# EAGLE board DAC_OutputStage 3 (EAGLE 9.6.2)
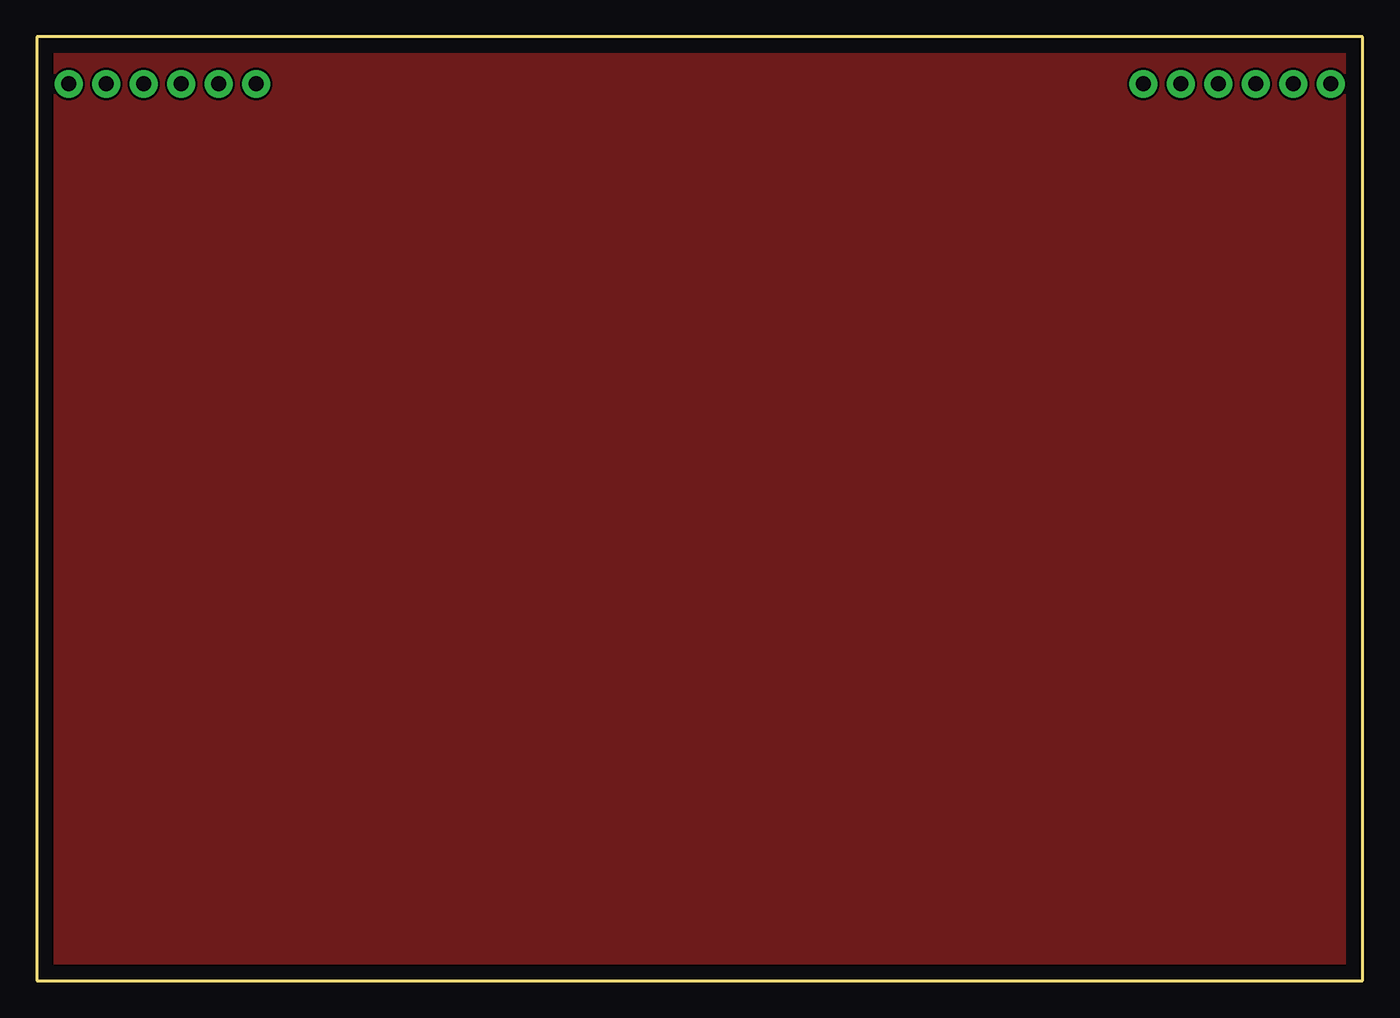
[diagram p0: board, top side]
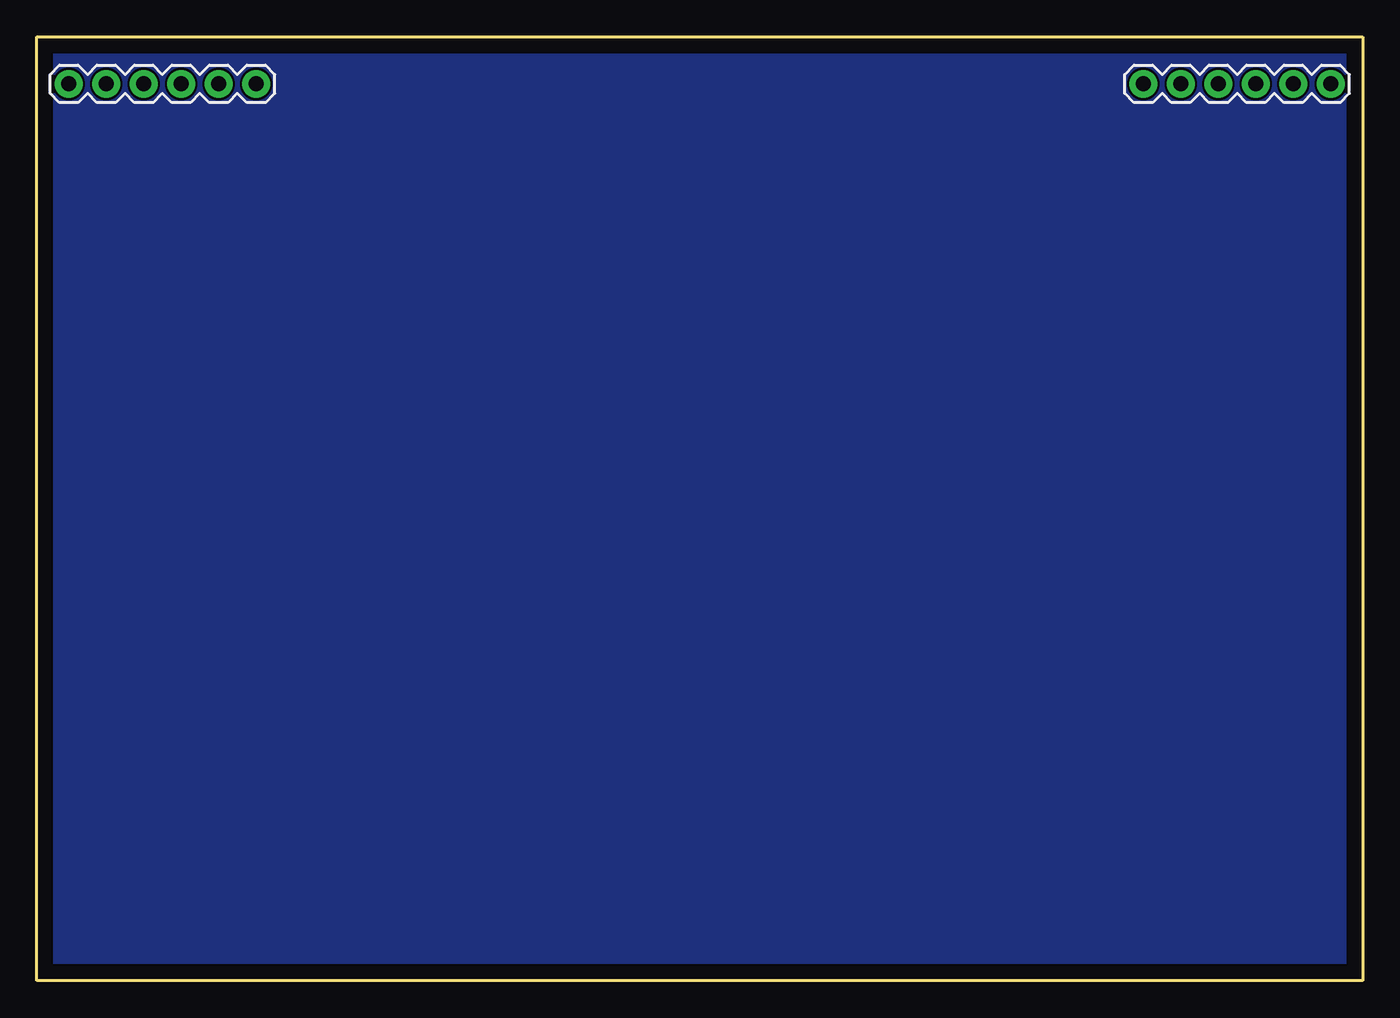
[diagram p1: board, bottom side, seen from below]

Size 89.89 x 64 mm. Coordinates in mm from the lower left corner, seen from the top.
Outline: 0,0 89.89,0 89.89,64 0,64 0,0
Copper layers (1*16): Top 0.035mm / dielectric 0.15mm / Bottom 0.035mm
Design rules "default": minimum track width 6mil, minimum drill 0.35mm, track to track 6mil, track to pad 6mil, pad to pad 6mil, via to via 6mil, smd to smd 6mil, copper to edge 40mil, drill to drill 6mil, minimum pad ring 10mil, minimum via ring 8mil, stop-mask expansion 4mil, vias tented up to drill 0mil, thermal gap 10mil
Net classes: 3 Power: width 1.27 mm, drill 1.27 mm, clearance 0.254 mm

## Footprints (pad centres in the part's own frame; a part is rotated, then mirrored left to right if it is on the bottom)
CAPPRD750W80D1475H4700 = drill 1 pad 1.5 square: 1 0,0 | drill 1 pad 1.5: 2 7.5,0
CAPPRD500W60D1025H1750 = drill 0.8 pad 1.2 square: 1 0,0 | drill 0.8 pad 1.2: 2 5,0
PANASONIC_A = smd 2 x 1.5: + 1.3,0; - -1.3,0
C0603 = smd 1.1 x 1: 1 -0.85,0; 2 0.85,0
CAPPRD150W45D450H600 = drill 0.65 pad 1.05 square: 1 0,0 | drill 0.65 pad 1.05: 2 1.5,0
MKP4D031003C00JSSD = drill 0.86 pad 1.397: 1 0,0; 2 10,0
C1206 = smd 1.6 x 1.8: 1 -1.4,0; 2 1.4,0
C7.5B3 = drill 0.914 pad 1.905 octagon: 1 -3.81,0; 2 3.81,0
MKP4D051007E00JSSD = drill 1.2 pad 1.8: 1 0,0; 2 37.5,0
CAPPRD750W80D1825H4150 = drill 1 pad 1.5 square: 1 0,0 | drill 1 pad 1.5: 2 7.5,0
DIOAD1405W86L465D235 = drill 1.05 pad 1.575 square: 1 0,0 | drill 1.05 pad 1.575: 2 14.1,0
1935190 = drill 1.3 pad 1.95 square: 1 0,0 | drill 1.3 pad 1.95: 2 5,0; 3 10,0; 4 15,0; 5 20,0
1X06 = drill 1.016 pad 1.88: 1 0,0; 2 2.54,0; 3 5.08,0; 4 7.62,0; 5 10.16,0; 6 12.7,0
1X07 = drill 1.016 pad 1.88: 1 0,0; 2 2.54,0; 3 5.08,0; 4 7.62,0; 5 10.16,0; 6 12.7,0; 7 15.24,0
R0603 = smd 1 x 1.1: 1 -0.85,0; 2 0.85,0
0411/15 = drill 0.914 octagon: 1 -7.62,0; 2 7.62,0
TRIMPOT_3266 = drill 1.016 pad 1.778: 1 -2.54,-1.27; 2 0,1.27; 3 2.54,-1.27
SJW = smd 1.27 x 2.54: 1 -1.27,0; 2 1.27,0
VT9-PT = drill 1.8 pad 2.4: 1 6.172,8.495; 2 0,10.5; 3 -6.172,8.495; 4 -9.986,3.245; 5 -9.986,-3.245; 6 -6.172,-8.495; 7 0,-10.5; 8 6.172,-8.495; 9 9.986,-3.244
B2,54 = smd 2.54 x 2.54: TP 0,0
CUI_SJ1-3523N = drill 0.8 long: 1 0,0; 2 5,-5; 3 5,5 | hole 1.2: -2.5,5; 0,5; 5,0; -2.5,-5; 0,-5

## Placement (x,y rotation side)
C1  68u  [CAPPRD750W80D1475H4700]  -51.9,40.51 0 top  (outside the outline)
C2  68u  [CAPPRD750W80D1475H4700]  -68.41,40.51 0 top  (outside the outline)
C3  68u  [CAPPRD750W80D1475H4700]  -84.92,40.51 0 top  (outside the outline)
C4  UCY2E220MPD1TD  [CAPPRD500W60D1025H1750]  -69.68,57.02 0 top  (outside the outline)
C5  68u  [CAPPRD750W80D1475H4700]  -101.43,40.51 0 top  (outside the outline)
C6  68u  [CAPPRD750W80D1475H4700]  -117.94,40.51 0 top  (outside the outline)
C7  68u  [CAPPRD750W80D1475H4700]  -30.31,59.56 0 top  (outside the outline)
C8  [PANASONIC_A]  -26.5,107.82 0 top  (outside the outline)
C9  [PANASONIC_A]  -31.58,107.82 0 top  (outside the outline)
C10  [PANASONIC_A]  -36.66,107.82 0 top  (outside the outline)
C11  [C0603]  -112.86,112.9 0 top  (outside the outline)
C12  [C0603]  -21.42,112.9 0 top  (outside the outline)
C13  [C0603]  -26.5,112.9 0 top  (outside the outline)
C14  [C0603]  -31.58,112.9 0 top  (outside the outline)
C15  [C0603]  -36.66,112.9 0 top  (outside the outline)
C15A  647-RNU1A100MDSASQ  [CAPPRD150W45D450H600]  -40.47,86.23 0 top  (outside the outline)
C15B  647-RNU1A100MDSASQ  [CAPPRD150W45D450H600]  -63.33,86.23 0 top  (outside the outline)
C16  [PANASONIC_A]  -41.74,107.82 0 top  (outside the outline)
C17  [PANASONIC_A]  -46.82,107.82 0 top  (outside the outline)
C17A  647-RNU1A100MDSASQ  [CAPPRD150W45D450H600]  -86.19,86.23 0 top  (outside the outline)
C17B  647-RNU1A100MDSASQ  [CAPPRD150W45D450H600]  -109.05,86.23 0 top  (outside the outline)
C18  [PANASONIC_A]  -51.9,107.82 0 top  (outside the outline)
C19  [C0603]  -41.74,112.9 0 top  (outside the outline)
C20  [C0603]  -46.82,112.9 0 top  (outside the outline)
C21  [C0603]  -51.9,112.9 0 top  (outside the outline)
C22  [C0603]  -56.98,112.9 0 top  (outside the outline)
C23  [C0603]  -62.06,112.9 0 top  (outside the outline)
C32  0.1uF, 35V  [C0603]  -92.54,92.58 0 top  (outside the outline)
C38*  0.1uF*, 63V  [MKP4D031003C00JSSD]  -35.39,92.58 0 top  (outside the outline)
C45*  4.7nF, 63V*  [C1206]  -114.13,79.88 0 top  (outside the outline)
C46*  0.033uF, 63V*  [C1206]  -63.33,79.88 0 top  (outside the outline)
C48  0.1uF, 35V  [C0603]  -102.7,92.58 0 top  (outside the outline)
C50  0.1uF, 35V  [C0603]  -112.86,92.58 0 top  (outside the outline)
C51*  0.01uF, 63V*  [C7.5B3]  -40.47,72.26 0 top  (outside the outline)
C52*  1500pF, 63V*  [C1206]  -90,79.88 0 top  (outside the outline)
C54*  4.7nF, 63V*  [C1206]  -26.5,86.23 0 top  (outside the outline)
C55*  0.033uF, 63V*  [C1206]  -77.3,79.88 0 top  (outside the outline)
C56*  1500pF, 63V*  [C1206]  -102.7,79.88 0 top  (outside the outline)
C57  0.1uF, 35V  [C0603]  -123.02,92.58 0 top  (outside the outline)
C58*  0.01uF, 63V*  [C7.5B3]  -53.17,72.26 0 top  (outside the outline)
C59*  0.1uF*, 63V  [MKP4D031003C00JSSD]  -50.63,92.58 0 top  (outside the outline)
C64  0.1uF, 35V  [C0603]  -26.5,97.66 0 top  (outside the outline)
C65  0.1uF, 35V  [C0603]  -36.66,97.66 0 top  (outside the outline)
C67  0.1uF, 35V  [C0603]  -46.82,97.66 0 top  (outside the outline)
C68*  10uF*  [MKP4D051007E00JSSD]  -58.25,22.73 0 top  (outside the outline)
C69  0.1uF, 35V  [C0603]  -56.98,97.66 0 top  (outside the outline)
C70*  10uF*  [MKP4D051007E00JSSD]  -102.7,22.73 0 top  (outside the outline)
C92*  0.1uF*, 63V  [MKP4D031003C00JSSD]  -65.87,92.58 0 top  (outside the outline)
C93*  0.1uF*, 63V  [MKP4D031003C00JSSD]  -81.11,92.58 0 top  (outside the outline)
C94*  UKZ1H102MHM  [CAPPRD750W80D1825H4150]  -79.84,-1.4 0 top  (outside the outline)
C95*  UKZ1H102MHM  [CAPPRD750W80D1825H4150]  -101.43,-1.4 0 top  (outside the outline)
D1  1N4007FFG  [DIOAD1405W86L465D235]  -45.55,117.98 0 top  (outside the outline)
D2  1N4007FFG  [DIOAD1405W86L465D235]  -67.14,117.98 0 top  (outside the outline)
D3  1N4007FFG  [DIOAD1405W86L465D235]  -88.73,117.98 0 top  (outside the outline)
D4  1N4007FFG  [DIOAD1405W86L465D235]  -110.32,117.98 0 top  (outside the outline)
J1  1935190  [1935190]  -102.7,57.02 0 top  (outside the outline)
J4  [1X06]  -106.51,107.82 0 top  (outside the outline)
J6  [1X07]  -70.95,107.82 0 top  (outside the outline)
J7  [1X06]  75.03,60.81 180 bottom
J8  [1X06]  2.16,60.81 180 bottom
J10  [1X07]  -90,107.82 0 top  (outside the outline)
J13  [1X06]  -123.02,107.82 0 top  (outside the outline)
R1  [R0603]  -121.75,112.9 0 top  (outside the outline)
R2  220  [0411/15]  -67.14,69.72 0 top  (outside the outline)
R3  220  [0411/15]  -84.92,69.72 0 top  (outside the outline)
R4  100k  [0411/15]  -102.7,69.72 0 top  (outside the outline)
R5  100k  [0411/15]  -26.5,78.61 0 top  (outside the outline)
R6  330  [0411/15]  -44.28,78.61 0 top  (outside the outline)
R7  [R0603]  -20.15,116.71 0 top  (outside the outline)
R8  [R0603]  -23.96,116.71 0 top  (outside the outline)
R9  [R0603]  -27.77,116.71 0 top  (outside the outline)
R10  [R0603]  -67.14,112.9 0 top  (outside the outline)
R11  [R0603]  -117.94,112.9 0 top  (outside the outline)
R12  [R0603]  -72.22,112.9 0 top  (outside the outline)
R13  [R0603]  -77.3,112.9 0 top  (outside the outline)
R13*  1k*  [R0603]  -63.33,97.66 0 top  (outside the outline)
R14  [R0603]  -82.38,112.9 0 top  (outside the outline)
R14*  1k*  [R0603]  -69.68,97.66 0 top  (outside the outline)
R15  [R0603]  -87.46,112.9 0 top  (outside the outline)
R16  [R0603]  -92.54,112.9 0 top  (outside the outline)
R17  [R0603]  -97.62,112.9 0 top  (outside the outline)
R18  1M*  [R0603]  -110.32,102.74 0 top  (outside the outline)
R19  1M* (Var)  [TRIMPOT_3266]  -43.01,54.48 0 top  (outside the outline)
R20  1M* (Var)  [TRIMPOT_3266]  -55.71,54.48 0 top  (outside the outline)
R21  100*  [R0603]  -59.52,102.74 0 top  (outside the outline)
R22  1M*  [R0603]  -115.4,102.74 0 top  (outside the outline)
R23  100*  [R0603]  -64.6,102.74 0 top  (outside the outline)
R24  100*  [R0603]  -69.68,102.74 0 top  (outside the outline)
R25  100*  [R0603]  -74.76,102.74 0 top  (outside the outline)
R26  [R0603]  -102.7,112.9 0 top  (outside the outline)
R27  [R0603]  -107.78,112.9 0 top  (outside the outline)
R32*  1*  [R0603]  -76.03,97.66 0 top  (outside the outline)
R33*  1*  [R0603]  -82.38,97.66 0 top  (outside the outline)
R34*  300*  [R0603]  -88.73,97.66 0 top  (outside the outline)
R35*  300*  [R0603]  -95.08,97.66 0 top  (outside the outline)
R36*  91*  [R0603]  -101.43,97.66 0 top  (outside the outline)
R37*  910*  [R0603]  -107.78,97.66 0 top  (outside the outline)
R38*  300*  [R0603]  -114.13,97.66 0 top  (outside the outline)
R39  1M*  [R0603]  -120.48,102.74 0 top  (outside the outline)
R40  1M*  [R0603]  -21.42,107.82 0 top  (outside the outline)
R42  100*  [R0603]  -79.84,102.74 0 top  (outside the outline)
R43  100*  [R0603]  -84.92,102.74 0 top  (outside the outline)
R44  150*  [R0603]  -90,102.74 0 top  (outside the outline)
R45  150*  [R0603]  -95.08,102.74 0 top  (outside the outline)
R46*  910*  [R0603]  -120.48,97.66 0 top  (outside the outline)
R47*  27*  [R0603]  -22.69,102.74 0 top  (outside the outline)
R48  100*  [R0603]  -100.16,102.74 0 top  (outside the outline)
R49  100*  [R0603]  -105.24,102.74 0 top  (outside the outline)
R50*  91*  [R0603]  -29.04,102.74 0 top  (outside the outline)
R51*  910*  [R0603]  -35.39,102.74 0 top  (outside the outline)
R52*  910*  [R0603]  -41.74,102.74 0 top  (outside the outline)
R53*  300*  [R0603]  -48.09,102.74 0 top  (outside the outline)
R54*  27*  [R0603]  -54.44,102.74 0 top  (outside the outline)
SJ1  SJW  [SJW]  -123.02,84.96 0 top  (outside the outline)
SJ2  SJW  [SJW]  -20.15,91.31 0 top  (outside the outline)
SX1  VT9-PT  [VT9-PT]  -30.31,1.14 0 top  (outside the outline)
SX2  VT9-PT  [VT9-PT]  -54.44,1.14 0 top  (outside the outline)
TP1  2.54MM_TESTPOINTB2,54  [B2,54]  -119.21,55.75 0 top  (outside the outline)
TP2  2.54MM_TESTPOINTB2,54  [B2,54]  -31.58,72.26 0 top  (outside the outline)
U$2  SJ1-3523N  [CUI_SJ1-3523N]  -26.5,41.78 0 top  (outside the outline)

## Library data of the parts
C1-C3 C5-C7 = 500HXW68MEFR14.5X45; DESCRIPTION: Aluminum Electrolytic Capacitors - Radial Leaded GENERAL PURPOSE ELECTROLYTIC CAPACITORS; HEIGHT: 47mm; MANUFACTURER_NAME: Rubycon; MANUFACTURER_PART_NUMBER: 500HXW68MEFR14.5X45
C4 = UCY2E220MPD1TD; DESCRIPTION: Aluminum Electrolytic Capacitors - Radial Leaded 22uF 250V 20% AEC-Q200; HEIGHT: 17.5mm; MANUFACTURER_NAME: Nichicon; MANUFACTURER_PART_NUMBER: UCY2E220MPD1TD; MOUSER_PART_NUMBER: 647-UCY2E220MPD1TD; MOUSER_PRICE-STOCK: https://www.mouser.co.uk/ProductDetail/Nichicon/UCY2E220MPD1TD?qs=JgOBn5pVFooNXIGMeLbPFg%3D%3D
C8-C23 = rcl; SPICEPREFIX: C
C15A C15B C17A C17B = Dual Mono Amp Library; DESCRIPTION: Aluminum Organic Polymer Capacitors 10 Volt 10uF 20%; HEIGHT: 6mm; MANUFACTURER_NAME: Nichicon; MANUFACTURER_PART_NUMBER: RNU1A100MDSASQ; MOUSER_PART_NUMBER: 647-RNU1A100MDSASQ; MOUSER_PRICE-STOCK: https://www.mouser.co.uk/ProductDetail/Nichicon/RNU1A100MDSASQ?qs=eL6fcoQH66Plszdei%2FxZtw%3D%3D
C32 C48 C50 C57 C64 C65 C67 C69 = Hifi Nutube DAC (Next 6) 28; BOM: Yes; DESCRIPTION: Multilayer Ceramic Capacitors MLCC - SMD/SMT 0603 35VDC 0.1uF 20% X7R AEC-Q200; DISTRIBUTOR_PART_NUMBER: 963-GMJ107BB7104MAHT; HEIGHT: 1mm; LINK: https://www.mouser.com/ProductDetail/Taiyo-Yuden/GMJ107BB7104MAHT?qs=%2Fha2pyFadujHrlowQtTjdnqfzoSa0Cvv97OkvRNS3sSjPFq524h2H2kGErSK5VOC; MANUFACTURER_NAME: Taiyo Yuden; MANUFACTURER_PART_NUMBER: GMJ107BB7104MAHT
C38* C59* C92* C93* = Hifi Nutube DAC (Next 6) 28; BOM: Yes; DESCRIPTION: Film Capacitors; DISTRIBUTOR_PART_NUMBER: 505-MKP4D031003C00JS; HEIGHT: 9mm; LINK: https://www.mouser.co.uk/ProductDetail/WIMA/MKP4D031003C00JSSD?qs=sJjjjplDs9ueBXe0w9lo%252BA%3D%3D; MANUFACTURER_NAME: WIMA; MANUFACTURER_PART_NUMBER: MKP4D031003C00JSSD
C45* C54* = Hifi Nutube DAC (Next 6) 28; BOM: Yes; DESCRIPTION: Film Capacitors 0.0047uF 100V; DISTRIBUTOR_PART_NUMBER: 598-FCN1206A472J-H3; HEIGHT: 1.5mm; LINK: https://www.mouser.com/ProductDetail/Cornell-Dubilier-CDE/FCN1206A472J-H3?qs=%2Fha2pyFaduhORVfYbZCGmxCqK95db7zSSJWHojgdBI%252BzmFkScQF0nfenN9ZoeiEO; MANUFACTURER_NAME: Cornell Dubilier; MANUFACTURER_PART_NUMBER: FCN1206A472J-H3
C46* C55* = Hifi Nutube DAC (Next 6) 28; BOM: Yes; DESCRIPTION: Film Capacitors 50V 0.033uF 10% AEC-Q200; DISTRIBUTOR_PART_NUMBER: 80-LDECA2330KA0N00; HEIGHT: 1.2mm; LINK: https://www.mouser.com/ProductDetail/KEMET/LDECA2330KA0N00?qs=%2Fha2pyFadugEIyDQa2ENH0AjZxxQDZeJ28kAZuvR%2FC2losCklUdb6g1kt1ueSJBC; MANUFACTURER_NAME: KEMET; MANUFACTURER_PART_NUMBER: LDECA2330KA0N00
C51* C58* = Hifi Nutube DAC (Next 6) 28; BOM: Yes
C52* C56* = Hifi Nutube DAC (Next 6) 28; BOM: Yes; DESCRIPTION: Film Capacitors 0.0015uF 100V; DISTRIBUTOR_PART_NUMBER: 598-FCN1206A152J-H2; HEIGHT: 1.1mm; LINK: https://www.mouser.com/ProductDetail/Cornell-Dubilier-CDE/FCN1206A152J-H2?qs=%2Fha2pyFaduhORVfYbZCGm9sZSPI%2Fe%2FXuzEUMvkXHyu6tGyMfSwqf2I4Pf5lTfeGU; MANUFACTURER_NAME: Cornell Dubilier; MANUFACTURER_PART_NUMBER: FCN1206A152J-H2
C68* C70* = Hifi Nutube DAC (Next 6) 28; BOM: Yes; DESCRIPTION: Film Capacitors 10uF 100 Volts 5%; DISTRIBUTOR_PART_NUMBER: 505-MKP4D051007E00JS; HEIGHT: 29mm; LINK: https://www.mouser.co.uk/ProductDetail/WIMA/MKP4D051007E00JSSD?qs=K1lkoHpmGTrGA8Eiln8cbQ%3D%3D; MANUFACTURER_NAME: WIMA; MANUFACTURER_PART_NUMBER: MKP4D051007E00JSSD
C94* C95* = Hifi Nutube DAC (Next 6) 28; BOM: Yes; DESCRIPTION: Aluminum Electrolytic Capacitors - Radial Leaded 50volts 1000uF 105c 18x40 7.5LS; DISTRIBUTOR_PART_NUMBER: 647-UKZ1H102MHM; HEIGHT: 41.5mm; LINK: https://www.mouser.co.uk/ProductDetail/Nichicon/UKZ1H102MHM?qs=kArNe9LFxXlhtsXCcA9QZA%3D%3D; MANUFACTURER_NAME: Nichicon; MANUFACTURER_PART_NUMBER: UKZ1H102MHM
D1-D4 = 1N4007FFG; DESCRIPTION: Rectifiers 1000V 1A Standard; HEIGHT: mm; MANUFACTURER_NAME: onsemi; MANUFACTURER_PART_NUMBER: 1N4007FFG; MOUSER_PART_NUMBER: 863-1N4007FFG; MOUSER_PRICE-STOCK: https://www.mouser.co.uk/ProductDetail/onsemi/1N4007FFG?qs=y2kkmE52mdPFE87Rxbyfgw%3D%3D
J1 = 1935190; DESCRIPTION: PCB terminal block, nominal current: 17.5 A, rated voltage (III/2): 400 V, nominal cross section: 1.5 mm?, Number of potentials: 5, Number of rows: 1, Number of positions per row: 5, product range: PT 1,5/..-H, pitch: 5 mm, connection method: Screw connection with wire protector, mounting: Wave soldering, conductor/PCB connection direction: 0 ?, color: green, Pin layout: Linear pinning, Solder pin [P]: 3.5 mm, type of packaging: packed in cardboard; HEIGHT: 11.55mm; MANUFACTURER_NAME: Phoenix Contact; MANUFACTURER_PART_NUMBER: 1935190; MOUSER_PART_NUMBER: 651-1935190; MOUSER_PRICE-STOCK: https://www.mouser.co.uk/ProductDetail/Phoenix-Contact/1935190?qs=QWULklcAmSS%2FS46GSzyZOw%3D%3D
J4 J7 J8 J13 = Dual Mono Amp Library; PROD_ID: CONN-08437
J6 J10 = Dual Mono Amp Library; PROD_ID: Combine 8288+14485
R1-R17 R26 R27 = rcl; SPICEPREFIX: R
R13* R14* = Hifi Nutube DAC (Next 6) 28; BOM: Yes; DESCRIPTION: Thick Film Resistors - SMD 0603 1Kohm 1% Anti-Surge AEC-Q200; DISTRIBUTOR_PART_NUMBER: 667-ERJ-PA3F1001V; HEIGHT: 0.45mm; LINK: https://www.mouser.com/ProductDetail/Panasonic/ERJ-PA3F1001V?qs=%2Fha2pyFadujWqMGonbcVXWpx%2FU6%252B66FAhXV1JmAEZGPjthXsc9llFQZIBNUyHLnF; MANUFACTURER_NAME: Panasonic; MANUFACTURER_PART_NUMBER: ERJ-PA3F1001V
R18 R22 R39 R40 = Hifi Nutube DAC (Next 6) 28; BOM: Yes; DESCRIPTION: Thick Film Resistors - SMD 1M OHM 1% 1/4W TC100; DISTRIBUTOR_PART_NUMBER: 652-CMP0603AFX-1004L; HEIGHT: 0.45mm; LINK: https://www.mouser.com/ProductDetail/Bourns/CMP0603AFX-1004ELF?qs=%2Fha2pyFaduhorRtoKKmEbo5q%2F6upGdOUUG%2FOf1KJV0z32o3g29o%2FeIMT1W%2FSHjF0; MANUFACTURER_NAME: Bourns; MANUFACTURER_PART_NUMBER: CMP0603AFX-1004ELF
R19 R20 = Hifi Nutube DAC (Next 6) 28; BOM: Yes; DESCRIPTION: TRIM POT, 1/4 BOURNS 3266
R21 R23-R25 R42 R43 R48 R49 = Hifi Nutube DAC (Next 6) 28; BOM: Yes; DESCRIPTION: Thick Film Resistors - SMD 0603 100ohm 1% Anti Surge AEC-Q200; DISTRIBUTOR_PART_NUMBER: 755-ESR03EZPF1000; HEIGHT: 0.45mm; LINK: https://www.mouser.com/ProductDetail/ROHM-Semiconductor/ESR03EZPF1000?qs=493kPxzlxfJdLkJZpX4ByA%3D%3D; MANUFACTURER_NAME: ROHM Semiconductor; MANUFACTURER_PART_NUMBER: ESR03EZPF1000
R32* R33* = Hifi Nutube DAC (Next 6) 28; BOM: Yes; DESCRIPTION: Thick Film Resistors - SMD 0603 1ohm 1% Anti Surge AEC-Q200; DISTRIBUTOR_PART_NUMBER: 755-ESR03EZPF1R00; HEIGHT: 0.45mm; LINK: https://www.mouser.com/ProductDetail/ROHM-Semiconductor/ESR03EZPF1R00?qs=%2Fha2pyFaduh9eay%252BsNz7PGNzrDcrKL3hZWraHvdrMk1JVIx2uIeBCVsTnUf%2FHw0o; MANUFACTURER_NAME: ROHM Semiconductor; MANUFACTURER_PART_NUMBER: ESR03EZPF1R00
R34* R35* R38* R53* = Hifi Nutube DAC (Next 6) 28; BOM: Yes; DESCRIPTION: Thick Film Resistors - SMD 0603 300ohm 1% Anti Surge AEC-Q200; DISTRIBUTOR_PART_NUMBER: 755-ESR03EZPF3000; HEIGHT: 0.45mm; LINK: https://www.mouser.com/ProductDetail/ROHM-Semiconductor/ESR03EZPF3000?qs=%2Fha2pyFaduh9eay%252BsNz7PFRefpzKMD9xofWTCPSmhdFs%252BZbv2oFxKRLRaxU5PZdR; MANUFACTURER_NAME: ROHM Semiconductor; MANUFACTURER_PART_NUMBER: ESR03EZPF3000
R36* R50* = Hifi Nutube DAC (Next 6) 28; BOM: Yes; DESCRIPTION: Thick Film Resistors - SMD 0603 91ohm 1% Anti-Surge AEC-Q200; DISTRIBUTOR_PART_NUMBER: 667-ERJ-PA3F91R0V; HEIGHT: 0.45mm; LINK: https://www.mouser.com/ProductDetail/Panasonic/ERJ-PA3F1001V?qs=%2Fha2pyFadujWqMGonbcVXWpx%2FU6%252B66FAhXV1JmAEZGPjthXsc9llFQZIBNUyHLnF; MANUFACTURER_NAME: Panasonic; MANUFACTURER_PART_NUMBER: ERJ-PA3F91R0V
R37* R46* R51* R52* = Hifi Nutube DAC (Next 6) 28; BOM: Yes; DESCRIPTION: Thick Film Resistors - SMD 0603 910ohm 1% Anti Surge AEC-Q200; DISTRIBUTOR_PART_NUMBER: 755-ESR03EZPF9100; HEIGHT: 0.45mm; LINK: https://www.mouser.com/ProductDetail/ROHM-Semiconductor/ESR03EZPF9100?qs=%2Fha2pyFaduh9eay%252BsNz7PCwRLTV5C4umDAX1y3ISJId208aI4l%252BoDAAx8YjFKWfQ; MANUFACTURER_NAME: ROHM Semiconductor; MANUFACTURER_PART_NUMBER: ESR03EZPF9100
R44 R45 = Hifi Nutube DAC (Next 6) 28; BOM: Yes; DESCRIPTION: Thick Film Resistors - SMD 0603 150ohm 1% Anti Surge AEC-Q200; DISTRIBUTOR_PART_NUMBER: 755-ESR03EZPF1500; HEIGHT: 0.45mm; LINK: https://www.mouser.com/ProductDetail/ROHM-Semiconductor/ESR03EZPF1500?qs=493kPxzlxfJnXyruM80Mgw%3D%3D; MANUFACTURER_NAME: ROHM Semiconductor; MANUFACTURER_PART_NUMBER: ESR03EZPF1500
R47* R54* = Hifi Nutube DAC (Next 6) 28; BOM: Yes; DESCRIPTION: Thick Film Resistors - SMD 27 OHM 1% 1/4W TC100; DISTRIBUTOR_PART_NUMBER: 652-CMP0603AFX-27R0L; HEIGHT: 0.45mm; LINK: https://www.mouser.com/ProductDetail/Bourns/CMP0603AFX-27R0ELF?qs=%2Fha2pyFaduhorRtoKKmEbtYBlIaVjUkc4K3wtBqYll71wqKXRZ5A38EveW8IeqhA; MANUFACTURER_NAME: Bourns; MANUFACTURER_PART_NUMBER: CMP0603AFX-27R0ELF
SJ1 SJ2 TP1 TP2 = Hifi Nutube DAC (Next 6) 28; BOM: No
SX1 SX2 = belton-engineering
U$2 = Hifi Nutube DAC (Next 6) 28; BOM: Yes; DESCRIPTION: 3.5 mm Right-Angle Stereo Jack, 3 Pin PCB Mount, Non-Threaded; MANUFACTURER_NAME: CUI

## Nets
66.3VAC/1: SX1.4 SX2.4
66.3VAC/2: SX1.5 SX2.5
126.3VAC/1: J1.1
126.3VAC/2: J1.2
+3.3V_ANALOG [Power]: R44.2 R45.1
+5V/1: C15A.1 C17A.1 J6.4 J6.5
+5V/2: C15B.1 J10.4
+18V [Power]: C48.1 C64.1 C65.1 C69.1
+240VDC: C10.+ C18.+ J1.5 SX1.6 SX2.6
-18V [Power]: C32.1 C50.1 C57.1 C67.1 R43.1 R49.1
AGND [Power]: C8.- C10.- C12.2 C16.- C18.- C20.2 C32.2 C45*.2 C46*.2 C48.2 C50.2 C51*.2 C54*.2 C55*.2 C57.2 C58*.2 C64.2 C65.2 C67.2 C68*.2 C69.2 C70*.2 R9.1 R11.2 R13*.1 R14*.1 R16.1 R18.2 R22.1 R26.2 R34*.1 R38*.1 R39.1 R40.1 U$2.1
AOUTL_N [R_Audio]: R52*.2
AOUTL_P [R_Audio]: R53*.1
AOUTR_N [R_Audio]: R46*.2
AOUTR_P [R_Audio]: R35*.1
DGND: C1.2 C2.2 C3.2 C4.2 C5.2 C6.2 C7.2 C15A.2 C15B.2 C17A.2 C17B.2 D1.2 D2.2 J1.4 J4.2 J4.5 J6.2 J6.7 J10.7 J13.5 R5.1
L+: C11.1
L-: C14.1
L_OUT: C13.1 C15.1 R9.2 R10.1 U$2.2
N$1: R3.1
N$2: D1.1 D4.2
N$3: C1.1 D3.1 D4.1
N$4: D2.1 D3.2
N$5: C2.1 R6.2
N$6: C4.1 R2.1 R3.2 R4.1 R5.2
N$8: C11.2 R1.1
N$9: C12.1 R1.2 R8.2 SX2.7
N$10: C93*.1
N$11: C92*.1
N$13: C19.2 R13.1
N$14: C9.+ R7.2 SX2.8
N$15: C9.- C13.2 R7.1 R8.1 SX2.1
N$16: C20.1 R13.2 R15.2 SX1.7
N$17: C17.+ R14.2 SX1.8
N$18: C17.- C21.2 R14.1 R15.1 SX1.1
N$19: C14.2 R12.1
N$20: C15.2 R10.2 R12.2 SX2.2
N$21: C8.+ R11.1 SX2.3
N$22: C22.2 R27.1
N$23: C23.2 R17.2 R27.2 SX1.2
N$24: C68*.1 R44.1
N$25: C70*.1 R45.2
N$26: C16.+ R26.1 SX1.3
N$29: C45*.1 R54*.1
N$30: C46*.1 R34*.2 R35*.2 R54*.2
N$31: C52*.1 R37*.1 R40.2
N$32: C52*.2 R36*.1
N$33: C51*.1 R36*.2 R37*.2 R46*.1
N$34: C54*.1 R47*.1
N$35: R21.2
N$36: C55*.1 R38*.2 R47*.2 R53*.2
N$37: C56*.1 R39.2 R51*.1
N$38: C56*.2 R50*.1
N$39: R19.3 R21.1 SJ1.1
N$40: R23.2
N$41 [R_Audio]: J4.4 J6.6
N$42: J10.2 J13.2
N$43: R24.2
N$44: R20.3 R24.1 SJ2.1
N$45: R25.2
N$46: C17B.1 J10.5
N$48: C58*.1 R50*.2 R51*.2 R52*.1
N$49: C59*.2 C94*.2 R14*.2
N$50: R32*.1
N$51: C59*.1 C94*.1 R32*.2
N$52: C38*.1 C95*.1 R33*.2
N$53: C38*.2 C95*.2 R13*.2
N$54: R19.1 R19.2 R23.1 TP1.TP
N$55: R20.1 R20.2 R25.1 TP2.TP
N$56: R48.2
N$57: R48.1
N$58: R49.2
N$60: R42.2
N$61: R42.1
N$63: R33*.1
N$65: R43.2
N$79: J10.1 J13.1
N$80: J13.6
N$82 [L_Audio]: J4.1 J6.1
N$83 [L_Audio]: J4.3 J6.3
N$87: J10.3 J13.3
N$88: J10.6 J13.4
N$90: J4.6
NUTUBE_L: C93*.2 R18.1
NUTUBE_R: C92*.2 R22.2
PE: J1.3
R+: C19.1
R-: C22.1
R_OUT: C21.1 C23.1 R16.2 R17.1 U$2.3
VCC: C3.1 C5.1 C6.1 C7.1 R4.2 R6.1 SJ1.2 SJ2.2

## Tracks (layer width: path | path; a pad name or v marks a point on that pad's centre or on a via)
66.3VAC/1  (1 unrouted)
66.3VAC/2  (1 unrouted)
+3.3V_ANALOG  (1 unrouted)
+5V/1  (3 unrouted)
+5V/2  (1 unrouted)
+18V  (3 unrouted)
+240VDC  (4 unrouted)
-18V  (5 unrouted)
AGND  (34 unrouted)
DGND  (20 unrouted)
DGND1
  pour Bottom (rank 6): 0,64 0,0 89.89,0 89.89,64
  pour Top (rank 6, no thermals): 0,64 0,0 89.89,0 89.89,64
L_OUT  (4 unrouted)
N$2  (1 unrouted)
N$3  (2 unrouted)
N$4  (1 unrouted)
N$5  (1 unrouted)
N$6  (4 unrouted)
N$8  (1 unrouted)
N$9  (3 unrouted)
N$13  (1 unrouted)
N$14  (2 unrouted)
N$15  (4 unrouted)
N$16  (3 unrouted)
N$17  (2 unrouted)
N$18  (4 unrouted)
N$19  (1 unrouted)
N$20  (3 unrouted)
N$21  (2 unrouted)
N$22  (1 unrouted)
N$23  (3 unrouted)
N$24  (1 unrouted)
N$25  (1 unrouted)
N$26  (2 unrouted)
N$29  (1 unrouted)
N$30  (3 unrouted)
N$31  (2 unrouted)
N$32  (1 unrouted)
N$33  (3 unrouted)
N$34  (1 unrouted)
N$36  (3 unrouted)
N$37  (2 unrouted)
N$38  (1 unrouted)
N$39  (2 unrouted)
N$41  (1 unrouted)
N$42  (1 unrouted)
N$44  (2 unrouted)
N$46  (1 unrouted)
N$48  (3 unrouted)
N$49  (2 unrouted)
N$51  (2 unrouted)
N$52  (2 unrouted)
N$53  (2 unrouted)
N$54  (3 unrouted)
N$55  (3 unrouted)
N$79  (1 unrouted)
N$82  (1 unrouted)
N$83  (1 unrouted)
N$87  (1 unrouted)
N$88  (1 unrouted)
NUTUBE_L  (1 unrouted)
NUTUBE_R  (1 unrouted)
R_OUT  (4 unrouted)
VCC  (7 unrouted)

## Text on the board
bDocu: AOLP DGND AOLN AORN DGND AORP | AOLP DGND AOLN AORN DGND AORP